# Altium PCB EST_MainV20.PcbDoc (part 4 of 7)
Units mil, origin at the board's own origin, x right, y up, seen from the top; angles counter-clockwise.
Board outline 2745 x 4540 mil, 2 copper layers (Top Layer, Bottom Layer); 326 components, 241 nets, 1052 pads, 399 vias.
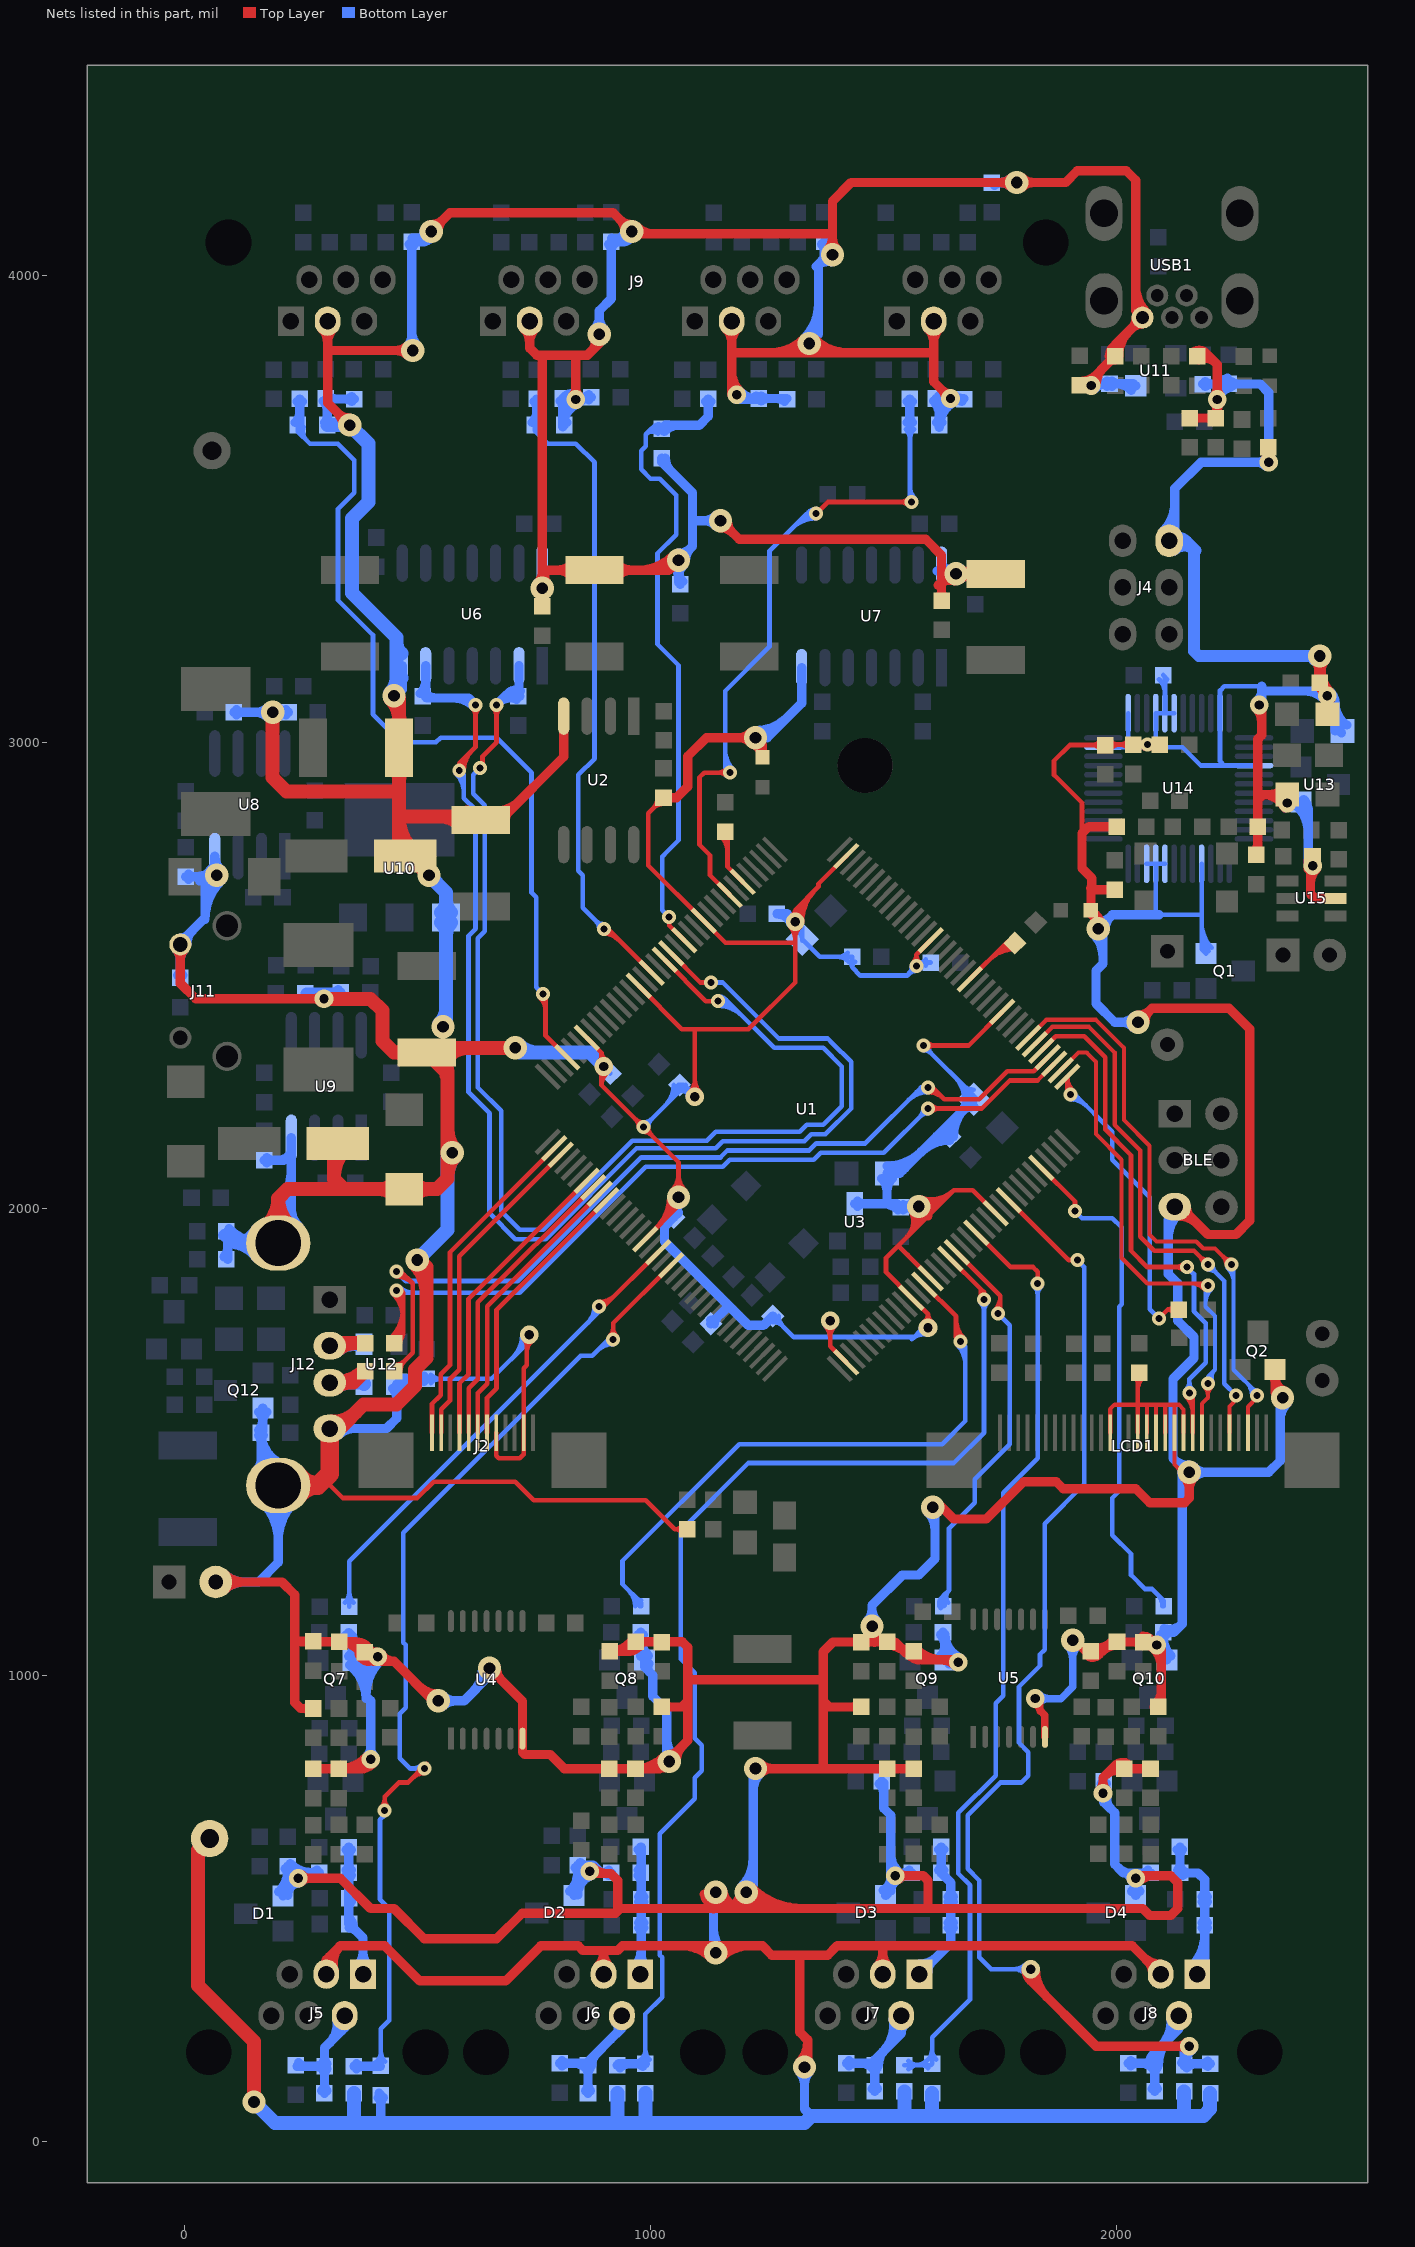
[diagram p4: the nets of this part, all layers, seen from the top]

## Via types
v1: diameter 30, hole 15, Top Layer to Bottom Layer, 237 vias
v2: diameter 50, hole 25, Top Layer to Bottom Layer, 93 vias
v3: diameter 40, hole 20, Top Layer to Bottom Layer, 68 vias
v4: diameter 60, hole 25, Top Layer to Bottom Layer, 1 vias

## Nets (pads, with @x,y where several pads share a name; then routed paths per layer and width w, separated by ;. In a path a pad name is that pad's centre, name@x,y a point inside that pad or via, vN(x,y) a via of type N, cw(c..) or ccw(c..) an arc to the next point about the centre after c; other vN are vias at no path point) (continued)
GND: (continued)
  Bottom Layer w20: J11.2@-17.43,2557.09 cw(c-40.68,2533.83) -7.8,2533.83 cw(c25.09,2533.83) J11.2@1.84,2557.09 ; C69.1@-13.61,2500.57 ccw(c-27.66,2514.62) -7.8,2514.62 ; C69.1@-8.16,2495.12 -7.8,2495.48 J11.2@-7.8,2566.72 ; -7.8,2512.88 ccw(c9.6,2512.88) C69.1@-2.7,2500.57 ; J11.2@-7.8,2580.34 ccw(c-7.8,2602.96) 8.2,2586.97 ; J11.2@4.02,2578.53 J11.2@-7.8,2566.72 ; R141.2@4.02,2712.01 42.01,2712.01 ; J11.2@5.83,2566.72 cw(c48.98,2566.72) 18.46,2597.23 ; R141.2@9.47,2706.55 cw(c22.65,2693.38) 22.65,2712.01 cw(c22.65,2730.64) R141.2@9.47,2717.46 ; 26.56,2712.01 ccw(c26.56,2758.44) 59.39,2725.61 ccw(c43.44,2741.56) U8.4@66,2741.56 ; 33.01,2703.01 cw(c64.44,2671.58) U8.4@65.93,2716 ; 41.01,2712.01 cw(c41.01,2686.01) v2@59.39,2704.39 ; 45,2620.41 cw(c161.84,2620.41) v2@80.45,2704.24 ; 45,2667.71 cw(c115.92,2667.71) U8.4@66.52,2718.59 ; U8.4@65.59,2735.59 cw(c66.56,2734.62) U8.4@66.61,2735.99 ; J10.2@68,1200 160,1200 201.97,1241.97 J12.6@201.97,1406.88 165,1443.85 R160.1@165,1520.02 ; v2@79.7,2726.45 cw(c104.73,2756) U8.4@66,2756 66,2736 42.01,2712.01 ; R159.1@82.31,1943.3 ccw(c126.49,1987.47) 126.49,1925 ; R158.1@85.54,1897.44 ccw(c65.13,1917.86) 94,1917.86 ; J10.2@85.68,1182.32 cw(c128.36,1139.64) 128.36,1200 cw(c128.36,1260.36) J10.2@85.68,1217.68 ; R158.1@94,1891.98 94,1925 ; R159.1@94,1951.98 94,1925 ; R159.1@96.46,1957.44 ccw(c174.77,2035.76) J12.5@174.77,1925 ; R139.1@107,3063.98 107.17,3064.16 v2(190,3064.16) C57.2@224.12,3064.16 ; R139.1@112.46,3058.53 cw(c126.05,3044.94) 126.05,3064.16 ; R139.1@112.46,3069.44 ccw(c125.21,3082.2) 125.21,3064.16 ; 132.77,1925 ccw(c132.77,1968.78) J12.5@168.45,1943.4 ; J12.5@152.15,1955 cw(c94,1996.36) 94,1925 ; J12.5@153.65,1896.13 ccw(c94,1848.95) 94,1925 ; J12.6@157.44,1441.57 ccw(c139.18,1459.82) 165,1459.82 ; R160.1@159.54,1514.56 cw(c146.37,1501.39) 165,1501.39 cw(c183.63,1501.39) R160.1@170.46,1514.56 ; R160.1@159.54,1525.47 ccw(c136.71,1548.3) 169,1548.3 ; Q12.1@160.16,1564.16 cw(c138.82,1542.82) 169,1542.82 cw(c199.18,1542.82) Q12.1@177.84,1564.16 ; 165,1460.61 ccw(c213.93,1460.61) J12.6@195.53,1415.27 ; 165,1490.31 ccw(c225.99,1490.31) J12.6@203.05,1433.8 ; J12.6@167.28,1372.19 cw(c83.54,1288.45) 201.97,1288.45 cw(c320.4,1288.45) J12.6@236.66,1372.19 ; Q12.1@169,1573 169,1524.02 R160.1@165,1520.02 ; R142.2@172.02,2104.01 214.01,2104.01 230,2120 U9.4@230,2152 230,1954.59 J12.5@201.97,1926.56 200.41,1925 94,1925 ; J12.5@177.12,1961.25 ccw(c49.47,2088.9) 230,2088.9 ; R142.2@177.47,2098.55 cw(c190.65,2085.38) 190.65,2104.01 cw(c190.65,2122.64) R142.2@177.47,2109.46 ; v2@179.39,3053.55 ccw(c153.79,3027.94) 153.79,3064.16 ccw(c153.79,3100.37) v2@179.39,3074.76 ; J12.6@181.42,1386.33 cw(c131.82,1336.73) 201.97,1336.73 cw(c272.11,1336.73) J12.6@222.51,1386.33 ; J12.5@191.27,1947.11 ccw(c97.75,2040.62) 230,2040.62 ; 201.05,2104.01 ccw(c201.05,2142.95) U9.4@228.59,2115.41 ; v2@201.05,3054.02 cw(c224.12,3032.84) C57.2@224.12,3064.16 ; v2@201.05,3074.3 ccw(c224.12,3095.47) C57.2@224.12,3064.16 ; D1.1@203.37,535.56 ccw(c157.92,581) R45.1@222.19,581 ; J12.5@205.41,1932.96 ccw(c146.04,1992.34) 230,1992.34 ; J12.6@210.57,1452.33 cw(c238.04,1520.01) R160.1@165,1520.02 ; D1.1@212.2,526.72 222.19,536.7 R45.1@222.19,590.72 ; R45.1@216.73,585.26 cw(c203.56,572.09) 222.19,572.09 cw(c240.82,572.09) R45.1@227.64,585.26 ; C57.2@218.67,3058.7 ccw(c205.5,3045.53) 205.5,3064.16 ccw(c205.5,3082.79) C57.2@218.67,3069.61 ; D1.1@222.19,528.65 cw(c248.72,528.65) v3@246.02,555.05 ; 222.19,550.81 cw(c246.45,550.81) v3@243.98,574.95 ; R45.1@227.64,596.18 ccw(c274.24,642.77) C15.2@274.24,576.88 ; 230,2001.08 ccw(c286.33,2001.08) J12.5@246.5,1961.25 ; R45.1@236.03,576.88 C15.2@290.33,576.88 ccw(c290.33,528.98) v3@252.83,558.78 ; R140.1@260,2461.98 R140.1@262.17,2464.16 ; R140.1@265.46,2456.53 cw(c283.88,2438.11) 283.88,2464.16 ; R140.1@272,2461.98 R140.1@272.17,2462.16 ; C15.2@284.87,571.42 ccw(c271.7,558.25) 271.7,576.88 ccw(c271.7,595.51) C15.2@284.87,582.33 ; v3@290.93,2445.79 ccw(c262.17,2432.46) R140.1@262.17,2464.16 ; R102.1@298.53,3731.54 cw(c277.79,3710.8) 307.12,3710.8 ; v3(300,2450) v3@300,2464.16 ; C41.1@301.66,3685.61 ccw(c288.49,3698.79) 307.12,3698.79 ccw(c325.75,3698.79) C41.1@312.57,3685.61 ; C41.1@307.12,3680.16 307.12,3733.87 305.14,3735.84 C43.1@364.88,3735.84 ; v3@309.24,2446.18 cw(c336.12,2435.07) C58.2@336.12,2464.16 v3@300,2464.16 ; R102.1@309.44,3742.46 ccw(c325.41,3758.42) 325.41,3735.84 ; J12.4@312.2,1528.92 433.92,1528.92 456,1551 U12.1@456,1624 467.39,1635.39 C68.2@519.84,1635.39 ; C58.2@330.67,2458.7 ccw(c317.5,2445.53) 317.5,2464.16 ccw(c317.5,2482.79) C58.2@330.67,2469.61 ; J12.4@331.48,1515.12 cw(c364.82,1481.78) 364.82,1528.92 cw(c364.82,1576.07) J12.4@331.48,1542.73 ; R41.1@347.75,1086.25 cw(c312.85,1051.35) Q7.1@362.2,1051.35 ; R41.1@353.2,1091.7 362.2,1082.7 Q7.1@362.2,1031.72 390,1031.72 ; Q7.1@353.37,1040.56 ccw(c332.03,1061.9) 362.2,1061.9 ccw(c392.38,1061.9) 371.04,1040.56 ccw(c392.38,1061.9) 392.38,1031.72 ccw(c392.38,1001.54) Q7.1@371.04,1022.88 ; Q7.1@354.61,1021.79 cw(c299.74,950.12) 390,950.12 ; C43.1@359.43,3730.39 ccw(c346.25,3717.21) 346.25,3735.84 ccw(c346.25,3754.47) C43.1@359.43,3741.3 ; Q7.1@366.76,1037.68 cw(c330.74,990.62) 390,990.62 ; Q7.1@370.87,1031.72 ccw(c370.87,1084.13) 407.93,1047.07 ccw(c451.21,1003.79) 390,1003.79 ; Q7.1@378.92,1053.56 cw(c361.75,1031.12) 390,1031.12 ; 390,955.5 cw(c499.5,955.5) v3@422.07,1032.93 ; v3@392.93,827.07 ccw(c375.86,844.14) 400,844.14 ccw(c424.14,844.14) v3@407.07,827.07 ; v3(400,820) 400,945 390,955 390,1031.72 ; C19.2@416.59,94.39 cw(c403.42,81.22) 422.05,81.22 cw(c440.68,81.22) C19.2@427.5,94.39 ; C19.2@417.88,104.02 C19.2@422.05,99.85 422.05,70 ; 420,40 422.05,42.05 422.05,70 ; 422.05,57.95 422.05,70 ; v3@423.28,1031.72 390,1031.72 ; v2@441.3,3112.22 ccw(c404.45,3164) U6.7@468,3164 468,3113 v2@455,3100 ; U12.1@446.81,1614.81 cw(c424.62,1592.62) 456,1592.62 cw(c487.38,1592.62) 465.19,1614.81 cw(c514.89,1565.11) C68.2@514.89,1635.39 ; v2@452.9,3095.93 ccw(c432.05,3125.21) U6.7@468,3125.21 ; v2@479.39,3850.61 ccw(c458.24,3871.76) 488.16,3871.76 ; C45.1@482.7,4067.43 cw(c469.53,4054.25) 488.16,4054.25 cw(c506.79,4054.25) C45.1@493.61,4067.43 ; v2@488.16,3841.84 C45.1@488.16,4072.88 ; 488.16,3880.66 ccw(c530.66,3880.66) v2@500.61,3850.61 ; C45.1@488.99,4080.55 ccw(c494.42,4130.58) v2(530,4095) 507.88,4072.88 C45.1@488.16,4072.88 ; 510.7,4072.88 ccw(c510.7,4097.32) v2@534.96,4094.4 ; C68.2@514.39,1629.94 ccw(c501.21,1616.76) 501.21,1635.39 ccw(c501.21,1654.02) C68.2@514.39,1640.85 ; v2@515.11,4096.79 cw(c488.16,4100.02) C45.1@488.16,4072.88 ; v2(545,945) 600,945 655,1000 v2(655,1015) ; v2@555.61,934.39 cw(c581.21,908.79) 581.21,945 cw(c581.21,981.21) v2@555.61,955.61 ; 618.79,963.79 ccw(c567.57,1015) v2@640,1015 ; v2@757.24,3340.61 ccw(c731.25,3366.59) U6.14@768,3366.59 ; v2(767.84,3330) 768,3330.16 U6.14@768,3384 U6.14@768,3413 ; U6.14@768,3365.83 ccw(c803.68,3365.83) v2@778.45,3340.61 ; R104.1@806.53,3731.54 cw(c793.35,3718.37) 811.98,3718.37 cw(c830.61,3718.37) 817.44,3731.54 cw(c837.48,3711.51) v3@837.48,3739.84 ; C42.1@811.98,3676.19 cw(c866.48,3676.19) v3@844.11,3725.88 ; 811.98,3706.35 ccw(c841.31,3706.35) C42.1@820.57,3685.61 ; 811.98,3707.13 cw(c852.55,3707.13) v3@835.89,3744.12 ; R104.1@814.92,3739.94 cw(c832.35,3722.51) v3@845.22,3743.53 ; C42.1@815.12,3680.16 811.98,3683.29 R104.1@811.98,3737 R104.1@814.83,3739.84 ; R104.1@815.94,3740.96 cw(c832.14,3724.76) v3@846.09,3742.93 ; D2.1@827.16,536.84 ccw(c786.55,577.45) R46.1@843.98,577.45 ; v3@831.25,3730.16 ccw(c814.83,3721.08) R104.1@814.83,3739.84 ; D2.1@836,528 843.98,535.98 R46.1@843.98,593 ; R46.1@838.53,587.54 cw(c825.35,574.37) 843.98,574.37 cw(c862.61,574.37) 849.44,587.54 cw(c862.61,574.37) 862.61,593 cw(c862.61,611.63) R46.1@849.44,598.46 ; D2.1@843.98,528.87 cw(c888.28,528.87) v3@873.37,570.58 ; 843.98,557.26 cw(c878.13,557.26) v3@866.63,589.42 ; v3@847.5,3728.39 cw(c872.88,3706) C44.1@872.88,3739.84 R104.1@814.83,3739.84 ; R46.1@860.08,578.77 ccw(c843.98,576.79) R46.1@843.98,593 ; C44.1@867.43,3734.39 ccw(c854.25,3721.21) 854.25,3739.84 ccw(c854.25,3758.47) C44.1@867.43,3745.3 ; v3@877.07,587.07 ccw(c903.42,613.42) C16.2@903.42,576.16 ; v2@879.39,3885.61 ccw(c853.79,3911.21) 890,3911.21 ccw(c926.21,3911.21) v2@900.61,3885.61 ; v3@888.14,581.86 ccw(c899.53,593.25) C16.2@910.75,581.69 ; v2(890,3875) 890,3925 916.16,3951.16 C46.1@916.16,4072.88 ; C16.2@910.67,570.7 ccw(c897.5,557.53) 897.5,576.16 ccw(c897.5,594.79) C16.2@910.67,581.61 ; C46.1@910.7,4067.43 cw(c897.53,4054.25) 916.16,4054.25 cw(c934.79,4054.25) C46.1@921.61,4067.43 ; C16.2@916.12,576.16 893.84,576.16 877,593 R46.1@843.98,593 ; C46.1@917.18,4080.53 ccw(c923.97,4131.03) v2(960,4095) 937.88,4072.88 C46.1@916.16,4072.88 ; 939.78,4072.88 ccw(c939.78,4098.38) v2@964.93,4094.18 ; v2@945.21,4097.47 cw(c916.16,4102.33) C46.1@916.16,4072.88 ; R42.1@973.54,1086.53 cw(c960.37,1073.35) 979,1073.35 cw(c997.63,1073.35) R42.1@984.46,1086.53 ; Q8.1@979,1041 R42.1@979,1091.98 ; R42.1@979,1082.49 ccw(c1036.49,1082.49) Q8.1@995.84,1041.84 ; Q8.1@987,1033 987,1018 1005,1000 1005,955 1035,925 1035,835 v2@1045,825 ; Q8.1@996.65,1025.06 ccw(c1006.74,1016.75) 997.5,1007.5 ; C49.1@1024.16,3608.88 1024.16,3600.84 1090,3535 1090,3475 ; C49.1@1031.87,3608.88 ccw(c1069.91,3608.88) 1043.01,3581.99 ; 1035,863.28 ccw(c1088.28,863.28) v2@1050.61,825.61 ; v2@1049.39,3379.39 cw(c1023.79,3353.79) 1060,3353.79 cw(c1096.21,3353.79) v2@1070.61,3379.39 ; C6.1@1060,1992.01 C6.1@1049.89,1981.89 1030,1962.01 1030,1930 1210,1750 1242.01,1750 C7.1@1262.11,1770.11 ; v2@1060,3367.03 ccw(c1091.75,3367.03) C40.1@1069.3,3344.57 ; v2@1060,3405 ccw(c1060,3441.21) 1085.61,3415.61 ccw(c1111.21,3390) v2@1075,3390 ; C40.1@1063.84,3339.12 1060,3342.96 v2(1060,3390) 1090,3420 1090,3475 ; C8.1@1129.38,1753.43 1167.1,1791.15 ; C8.1@1129.38,1761.15 ccw(c1129.38,1779.78) 1142.55,1766.61 ccw(c1155.72,1753.43) C8.1@1137.09,1753.43 ; v2@1135,405 v2@1135,535 ; 1135,453.28 ccw(c1188.28,453.28) v2@1150.61,415.61 ; 1135,486.72 cw(c1188.28,486.72) v2@1150.61,524.39 ; v2@1139.39,3464.39 ccw(c1113.79,3438.79) 1113.79,3475 ccw(c1113.79,3511.21) v2@1139.39,3485.61 ; v2(1150,3475) 1090,3475 ; v3@1185,3735 1231.98,3735 cw(c1231.98,3790.18) v3@1192.21,3751.93 ; v2@1194.39,545.61 ccw(c1132.57,607.43) 1220,607.43 ; v2(1205,535) 1220,550 v2@1220,785 ; 1208.53,3735 ccw(c1208.53,3760.46) R120.1@1226.53,3742.46 ; v2@1208.54,531.46 ccw(c1180.86,559.14) 1220,559.14 ; 1220,751.72 cw(c1273.28,751.72) v2@1235.61,789.39 ; v2@1225,3005 ccw(c1225,3053.28) 1259.14,3019.14 ; v2(1225,3010) 1250,3010 1324,3084 U7.7@1324,3160 ; v2@1225,3025 ccw(c1225,3121.57) 1293.28,3053.28 ; R120.1@1231.98,3737 C51.1@1291.73,3737 ; R120.1@1237.44,3731.54 cw(c1250.61,3718.37) 1250.61,3737 cw(c1250.61,3755.63) R120.1@1237.44,3742.46 ; 1271.46,3737 cw(c1271.46,3714.42) C51.1@1287.43,3730.39 ; v3@1300.61,2611.56 ccw(c1271.12,2600.75) C61.1@1271.12,2632.16 1292.84,2632.16 v3(1310,2615) ; v2@1319.39,149.39 cw(c1293.79,123.79) 1330,123.79 cw(c1366.21,123.79) v2@1340.61,149.39 ; v2@1329.39,3865.61 ccw(c1255.5,3939.5) 1360,3939.5 ; v2@1330,150 1330,70 1345,55 ; v2(1340,3855) 1360,3875 1360,4025 1372.16,4037.16 C53.1@1372.16,4062.84 ; v2@1343.54,3851.46 ccw(c1303.79,3891.21) 1360,3891.21 ; 1355,4020 cw(c1381.03,3993.97) v2@1387.4,4030.23 ; C53.1@1366.7,4067.43 cw(c1353.53,4054.25) 1372.16,4054.25 cw(c1390.79,4054.25) C53.1@1377.61,4067.43 ; C53.1@1372.16,4072.88 C53.1@1372.16,4062.84 ; C53.1@1379.58,4070.78 ccw(c1399.96,4065) v2@1384.98,4050.02 ; v2(1390,4045) C53.1@1372.16,4062.84 ; U3.2@1438,2011 1510,2011 ; U3.2@1443.66,2005.34 cw(c1457.31,1991.69) 1457.31,2011 cw(c1457.31,2030.31) U3.2@1443.66,2016.66 ; v2@1464.39,1115.61 ccw(c1438.79,1141.21) 1475,1141.21 ccw(c1511.21,1141.21) v2@1485.61,1115.61 ; v2(1475,1105) v2@1475,1115 ; v2@1480,1110 v2@1475,1115 ; R47.1@1490.53,767.54 cw(c1467.66,744.68) 1500,744.68 ; C12.1@1495.92,2064.91 cw(c1469.31,2038.3) 1506.95,2038.3 cw(c1544.58,2038.3) C12.1@1517.97,2064.91 ; R47.1@1495.98,773 1500,768.98 1500,715 1515,700 1515,575 1515,570 v3@1515,565 ; 1498.07,2011 cw(c1498.07,1965.06) R9.1@1530.56,1997.54 ; D3.1@1498.69,539.31 ccw(c1486.62,565) v3@1515,565 ; D3.1@1504,528 1515,539 v3@1515,565 ; C12.1@1506.95,2071.53 ccw(c1506.95,2126.63) 1545.91,2087.67 ; C12.1@1506.95,2091.53 ccw(c1506.95,2194.92) 1580.05,2121.81 ; D3.1@1515,537.43 cw(c1541.52,537.43) v3@1529.52,561.08 ; 1515,618.28 ccw(c1573.28,618.28) v3@1532.07,577.07 ; v3@1525,576.16 C17.2@1560.13,576.16 ; v3@1533.79,565.23 cw(c1552.16,555.26) 1552.16,576.16 C17.2@1560.13,576.16 ; R9.1@1541.47,1997.54 cw(c1554.65,1984.37) 1554.65,2003 cw(c1554.65,2021.63) R9.1@1541.47,2008.46 ; R9.1@1543.62,2003 cw(c1543.62,1973.62) v2@1564.39,1994.39 ; C17.2@1554.67,570.7 ccw(c1541.5,557.53) 1541.5,576.16 ccw(c1541.5,594.79) C17.2@1554.67,581.61 ; v2@1564.01,2015.21 cw(c1536.02,2041.19) R9.1@1536.02,2003 ; v2@1573,2003 R9.1@1536.02,2003 ; 1579.44,2121.2 cw(c1641.57,2059.07) C85.2@1641.57,2146.93 ; v2@1594.39,1349.39 cw(c1556.72,1311.72) 1610,1311.72 ; R122.1@1606.53,3731.54 cw(c1576.13,3701.15) 1619.12,3701.15 ; v2@1610,1370 1610,1250 1575,1215 1540,1215 1475,1150 v2@1475,1115 ; 1613.58,2155.34 cw(c1641.57,2127.35) C85.2@1641.57,2166.93 ; C50.1@1613.66,3685.61 ccw(c1600.49,3698.79) 1619.12,3698.79 ccw(c1637.75,3698.79) C50.1@1624.57,3685.61 ; U7.14@1614.17,3367.08 cw(c1625.24,3350.1) v2@1639.57,3364.43 ; R122.1@1617.44,3731.54 cw(c1630.61,3718.37) 1630.61,3737 cw(c1630.61,3755.63) R122.1@1617.44,3742.46 ; C50.1@1619.12,3675.35 cw(c1682.15,3675.35) v3@1648.36,3728.56 ; C50.1@1619.12,3680.16 1619.12,3729.87 R122.1@1611.98,3737 v3(1643,3737) C52.1@1671.72,3737 ; 1619.12,3711.74 cw(c1659.04,3711.74) v3@1637.64,3745.44 ; R43.1@1621.54,1086.53 cw(c1598.71,1063.7) 1631,1063.7 ; Q9.1@1622.16,1041.84 ccw(c1600.82,1063.18) 1631,1063.18 ccw(c1661.18,1063.18) 1639.84,1041.84 ccw(c1661.18,1063.18) 1661.18,1033 ccw(c1661.18,1002.82) Q9.1@1639.84,1024.16 ; U7.14@1624,3380 v2@1643,3361 ; R43.1@1627,1091.98 R43.1@1631,1087.98 ; C85.2@1629.29,2154.65 cw(c1668.87,2154.65) 1640.88,2182.64 ; U7.14@1630,3374 ccw(c1638.57,3382.56) v2@1645.91,3372.93 ; 1631,1057.22 ccw(c1672.97,1057.22) v3@1655.94,1018.86 ; v3@1635.93,3729.93 ccw(c1618.86,3712.86) 1618.86,3737 ccw(c1618.86,3761.14) v3@1635.93,3744.07 ; C85.2@1649.29,2154.65 cw(c1737.16,2154.65) C9.2@1675.02,2216.78 ; v3@1650.07,3729.93 cw(c1667.14,3712.86) 1667.14,3737 cw(c1667.14,3761.14) v3@1650.07,3744.07 ; v3@1651.46,3737 cw(c1651.46,3714.42) C52.1@1667.43,3730.39 ; Q9.1@1651.84,1022.22 ccw(c1631,1007.47) Q9.1@1631,1033 ; v2(1655,3361) 1693.96,3361 C48.1@1695.84,3359.12 ; v3@1664.06,1037.14 cw(c1686.63,1087.98) R43.1@1631,1087.98 ; v3@1665,1033 Q9.1@1631,1033 ; v2@1665.61,3350.39 cw(c1691.21,3324.79) 1691.21,3361 cw(c1691.21,3397.21) v2@1665.61,3371.61 ; v2@1672.67,3361 cw(c1672.67,3335.95) C48.1@1690.39,3353.66 ; C9.2@1677.49,2234.83 cw(c1639.85,2234.83) 1666.46,2208.22 cw(c1693.08,2181.6) C9.2@1693.08,2219.24 ; C9.2@1693.08,2234.83 1534.18,2075.94 C12.1@1506.95,2075.94 1506.95,2014.06 1510,2011 ; C54.1@1732.72,4200 v2(1785,4200) ; C54.1@1737.3,4193.66 cw(c1752.6,4178.36) 1752.6,4200 ; v2@1774.39,4189.39 ccw(c1748.79,4163.79) 1748.79,4200 ccw(c1748.79,4236.21) v2@1774.39,4210.61 ; v2@1949.39,2589.39 cw(c1899.64,2539.64) 1970,2539.64 ; v3@1952.07,3757.93 cw(c1978.51,3731.49) R149.1@1978.51,3768.88 ; v2@1960,2615 ccw(c1960,2651.21) 1985.61,2625.61 ccw(c2011.21,2600) v2@1975,2600 ; v3@1960,3768.88 2035.12,3768.88 U11.1@2040,3764 ; v3@1963.5,754.58 ccw(c1947.76,773) R48.1@1971.98,773 1971.98,728.02 1995,705 1995,595 2013.84,576.16 ; 1965.07,3768.88 ccw(c1965.07,3787.91) R149.1@1978.53,3774.46 ; 1965.64,3768.88 cw(c1965.64,3750.66) R149.1@1978.53,3763.54 ; R48.1@1966.53,767.54 cw(c1953.35,754.37) 1971.98,754.37 cw(c1990.61,754.37) R48.1@1977.44,767.54 ; v3@1979.47,743.76 ccw(c2007.3,734.28) 1986.51,713.49 ; R149.1@1989.44,3763.54 cw(c2002.33,3750.66) 2002.33,3768.88 ; R149.1@1989.44,3774.46 ccw(c2002.9,3787.91) 2002.9,3768.88 ; R149.1@1996.83,3768.88 cw(c1996.83,3720.83) U11.1@2030.81,3754.81 ; 2002.56,587.44 ccw(c2033.56,618.43) v3@2038.91,574.93 ; v3@2030.36,562.86 ccw(c2013.84,559.26) 2013.84,576.16 ; D4.1@2031.16,536.84 ccw(c2009.52,558.48) v3@2040.13,558.48 ; v3@2033.05,557.93 cw(c2015.98,540.86) 2040.13,540.86 cw(c2064.27,540.86) v3@2047.2,557.93 ; v2@2034.39,2389.39 ccw(c2008.79,2363.79) 2008.79,2400 ccw(c2008.79,2436.21) v2@2034.39,2410.61 ; D4.1@2040,528 2040.13,528.12 v3(2040.13,565) v3@2040.13,576.16 ; v3@2040.13,557.88 ccw(c2069.88,557.88) D4.1@2048.84,536.84 ; v2(2045,2400) 1995,2400 1955,2440 1955,2510 1970,2525 1970,2590 v2(1960,2600) 1990,2630 2090,2630 ; v3@2049.33,561.08 cw(c2072.12,551.38) C18.2@2072.13,576.16 v3@2040.13,576.16 ; C18.2@2066.67,570.7 ccw(c2053.5,557.53) 2053.5,576.16 ccw(c2053.5,594.79) C18.2@2066.67,581.61 ; R44.1@2083.83,1074.93 ccw(c2081.83,1091.98) R44.1@2099,1091.98 ; R44.1@2093.54,1086.53 cw(c2080.37,1073.35) 2099,1073.35 cw(c2117.63,1073.35) 2104.46,1086.53 cw(c2117.63,1073.35) 2117.63,1091.98 cw(c2117.63,1110.61) R44.1@2104.46,1097.44 ; v3@2094.76,1062.83 ccw(c2121.01,1057.01) Q10.1@2102,1038 ; J4.2@2098.19,3451.28 ccw(c2035.89,3513.59) 2124,3513.59 ; R44.1@2099,1082.49 ccw(c2156.49,1082.49) Q10.1@2115.84,1041.84 ; R44.1@2100.96,1099.45 ccw(c2111.3,1138.7) 2140,1110 ; Q10.1@2107,1033 2099,1041 R44.1@2099,1091.98 ; 2110,1936.27 cw(c2186.26,1936.27) BLE.5@2132.34,1990.19 ; J4.2@2112.33,3437.14 ccw(c2084.17,3465.3) 2124,3465.3 ; 2122.5,1462.5 ccw(c2152.78,1492.78) v2@2154.42,1449.99 ; BLE.5@2124,2004 2124,1990 2110,1976 2110,1860 2130,1840 2130,1760 2165,1725 2165,1680 2120,1635 2120,1465 v2@2150,1435 ; J4.2@2124,3432 2124,3544 2180,3600 v3(2325,3600) 2325,3750 2306.88,3768.12 C63.2@2239.84,3768.12 2215,3768.12 ; 2132.93,1452.07 cw(c2115.86,1435) v2@2140,1435 ; 2140,1362.57 cw(c2227.43,1362.57) 2165.61,1424.39 cw(c2191.21,1398.79) 2191.21,1435 cw(c2191.21,1471.21) v2@2165.61,1445.61 ; 2140,1410.86 cw(c2179.14,1410.86) v2@2151.46,1438.54 ; R143.2@2184.02,3768.01 2184.13,3768.12 2215,3768.12 ; R143.2@2189.47,3762.55 cw(c2202.93,3749.1) 2202.93,3768.12 ; R143.2@2189.47,3773.46 ccw(c2202.36,3786.35) 2202.36,3768.12 ; v3@2207.93,3742.07 ccw(c2190.86,3759.14) 2215,3759.14 ccw(c2239.14,3759.14) v3@2222.07,3742.07 ; v3@2215,3726.72 cw(c2249.89,3726.72) C63.2@2241.66,3760.63 ; v3(2215,3735) 2215,3768.12 ; v3@2215,3752.15 cw(c2243.72,3752.15) C63.2@2236.95,3780.06 ; C63.2@2245.3,3762.67 cw(c2258.47,3749.5) 2258.47,3768.12 cw(c2258.47,3786.75) C63.2@2245.3,3773.58 ; v3@2299,3088 ccw(c2282.5,3110) 2310,3110 ; v3(2305,3080) 2310,3085 2310,3110 ; 2310,3120 2310,3110 ; v3@2317.93,3592.93 ccw(c2300.86,3575.86) 2300.86,3600 ccw(c2300.86,3624.14) 2317.93,3607.07 ccw(c2300.86,3624.14) 2325,3624.14 ccw(c2349.14,3624.14) v3@2332.07,3607.07 ; 2350,1546.72 cw(c2403.28,1546.72) v2@2365.61,1584.39 ; v2@2350,1595 2350,1460 2325,1435 v2(2155,1435) v2@2150,1435 ; v3@2360,2860 2372,2872 U13.2@2395,2872 2410,2857 v3@2410,2735 ; v3@2372.07,2862.93 cw(c2393.97,2841.03) U13.2@2393.97,2872 ; U13.2@2386.16,2863.16 cw(c2328.61,2805.61) 2410,2805.61 ; U13.2@2400.3,2877.3 cw(c2376.89,2853.89) U13.2@2410,2853.89 ; 2402.66,3110 cw(c2402.66,3051.72) 2443.87,3092.93 cw(c2386.43,3035.48) C73.2@2467.67,3035.48 ; 2410,2783.28 ccw(c2468.28,2783.28) v3@2427.07,2742.07 ; v3@2458.02,3107.07 cw(c2434.71,3083.77) 2467.67,3083.77 ; C73.2@2467.67,3024.06 2467.67,3083.28 ; C73.2@2467.67,3045.79 ccw(c2498.23,3045.79) C73.2@2481.21,3020.4 ; C73.2@2492.35,3037.01 cw(c2523.36,3083.27) 2467.67,3083.27 ; J11.2@-7.8,2566.72 -7.8,2570.97 45,2623.77 45,2709.02 42.01,2712.01 ; R159.1@85.54,1946.53 cw(c65.13,1926.11) 94,1926.11 ; R159.1@85.54,1946.53 cw(c65.13,1926.11) 94,1926.11 ; R159.1@85.54,1946.53 cw(c65.13,1926.11) 94,1926.11 ; R140.1@262.17,2464.16 v3@300,2464.16 ; 390,1031.72 ccw(c390,1007.07) 371.56,1023.43 cw(c390,1007.07) 390,1031.72 ; 390,1031.72 cw(c390,1056.37) 371.56,1040.01 ccw(c390,1056.37) 390,1031.72 ; 390,1031.72 ccw(c390,1047.95) 405.47,1043.03 cw(c390,1047.95) 390,1031.72 ; 1510,2011 cw(c1510,1989.33) 1529.19,1999.41 ccw(c1510,1989.33) 1510,2011 ; 1510,2011 1528.02,2011 R9.1@1536.02,2003 ; C17.2@1560.13,576.16 ccw(c1560.12,539.9) 1532.59,563.49 cw(c1560.12,539.9) C17.2@1560.13,576.16 ; Q9.1@1631,1033 R43.1@1631,1087.98 ; 2013.84,576.16 v3@2040.13,576.16 ; R44.1@2099,1091.98 2121.98,1091.98 2140,1110 ; 2140,1110 v2@2140,1435 ; v2@2140,1435 v2@2150,1435 ; 2221.21,3768.13 ccw(c2221.21,3786.75) C63.2@2234.39,3773.58 ; 2221.21,3768.12 cw(c2221.21,3749.5) C63.2@2234.39,3762.67 ; 2221.21,3768.13 ccw(c2221.21,3786.75) C63.2@2234.39,3773.58 ; 2221.21,3768.12 cw(c2221.21,3749.5) C63.2@2234.39,3762.67 ; 2221.21,3768.13 ccw(c2221.21,3786.75) C63.2@2234.39,3773.58 ; 2221.21,3768.12 cw(c2221.21,3749.5) C63.2@2234.39,3762.67 ; 2310,3110 2430,3110 2437.03,3102.97 2447.97,3102.97 v3(2450.95,3100) 2467.67,3083.28
  Bottom Layer w25: J4.2@2106.91,3432.67 cw(c2127.03,3408.39) 2149.32,3430.68 ; J4.2@2109.47,3434.09 cw(c2124.23,3389.92) 2157.15,3422.85 ; J4.2@2112,3432 2124,3432 2148,3432 ; J4.2@2122.86,3413.41 cw(c2144.62,3387.15) 2168.74,3411.26 ; J4.2@2125.16,3421.2 cw(c2148,3402.46) 2148,3432 ; J4.2@2125.16,3442.8 ccw(c2148,3461.54) 2148,3432 ; v2(2435,3185) 2425,3175 2415,3185 2175,3185 2165,3195 2165,3415 2148,3432
  Bottom Layer w30: v2@165,70 195,40 420,40 ; C41.1@307.12,3680.16 354.84,3680.16 v2(355,3680) 395,3640 395,3515 360,3480 360,3320 455,3225 v2@455,3100 ; 363.99,41.01 R57.2@363.99,104.02 ; 400,40 420,40 ; v2@442.93,3107.07 ccw(c413.79,3136.21) 455,3136.21 ; v2@455,3111.86 cw(c492.14,3111.86) U6.7@465.88,3138.12 ; 455,3216.14 ccw(c492.14,3216.14) U6.7@465.88,3189.88 ; v2(500,1890) 565,1955 565,2110 v2(575,2120) ; v2(525,2715) 562,2678 U10.1@562,2624 v2@562,2403 ; v2@547.93,2397.07 ccw(c513.96,2431.04) 562,2431.04 ; U10.1@551.39,2613.39 cw(c525.79,2587.79) 562,2587.79 cw(c598.21,2587.79) U10.1@572.61,2613.39 ; U10.1@551.39,2634.61 ccw(c525.79,2660.21) 562,2660.21 ccw(c598.21,2660.21) U10.1@572.61,2634.61 ; 565,2071.72 cw(c623.28,2071.72) v2@582.07,2112.93 ; v2(710,2345) 720,2335 870,2335 v3@895,2310 ; v2@717.07,2352.07 ccw(c758.28,2393.28) 758.28,2335 ; 928.99,58.99 R58.2@928.99,104.02 ; C20.2@988.84,104.12 988.84,41.16 990,40 ; 1543.99,56.01 R59.2@1543.99,108.02 ; 1603.84,56.16 C21.2@1603.84,104.12 ; 2143.99,61.01 R60.2@2143.99,108.02 ; C22.2@2199.84,104.12 2199.84,69.84 2185,55 1345,55 1330,40 990,40 ; 420,40 460,40 990,40
  other v1: 2065,2995
  other v2: 1330,160 1140,405 1140,535 1040,815 2355,1595 555,2390 70,2715 450,3100
  other v3: 870,580 1970,746.98 1825,950 1660,1028 415,1040 2085,1065 1595,1745 2420,2735 2365,2870 1185,3745 1945,3765
HD+: J12.3 R163.2 U12.2 | length 349.3
  Top Layer w30: J12.3@316.87,1632.02 J12.3@312.2,1627.35 363.34,1627.35 R163.2@388.01,1652.02 ; J12.3@321.9,1627.35 ccw(c321.9,1718.12) R163.2@386.09,1653.94 ; J12.3@327.95,1617.08 cw(c352.75,1592.28) 352.75,1627.35 cw(c352.75,1662.42) J12.3@327.95,1637.62
  Bottom Layer w30: J12.3@312.2,1627.35 382.65,1627.35 U12.2@386,1624 ; J12.3@327.95,1617.08 cw(c352.75,1592.28) 352.75,1627.35 cw(c352.75,1662.42) J12.3@327.95,1637.62
HD-: J12.2 R162.2 U12.3 | length 235.2
  Top Layer w30: J12.2@312.2,1706.09 J12.2@318.28,1700.02 ; J12.2@318.28,1712.02 R162.2@388.01,1712.02 ; J12.2@327.95,1695.82 cw(c367.06,1656.71) 367.06,1712.02
  Bottom Layer w30: J12.2@312.2,1706.09 316.11,1710 U12.3@386,1710 ; J12.2@327.95,1695.82 cw(c362.19,1661.58) 362.19,1710
HOSTDM: R162.1 U1.75 | length 2177.8
  Top Layer w10: R162.1@442.01,1721.01 ccw(c374.43,1788.59) 470,1788.59 ; v1@447.93,1817.93 cw(c394.64,1764.64) 470,1764.64 ; R162.1@449.08,1713.94 ccw(c398.57,1764.44) 470,1764.44 ; R162.1@451,1712.02 470,1731.02 ; R162.1@452.25,1724.67 ccw(c454.42,1746.59) 470,1731.01 ; R162.1@456.15,1706.87 ccw(c422.71,1740.3) 470,1740.3 ; v1@462.07,1832.07 cw(c442.93,1812.93) 470,1812.93 ; R162.1@463.65,1713.27 cw(c485.57,1715.44) 470,1731.01 ; 470,1788.79 ccw(c418.79,1788.79) v1(455,1825) 465,1825 470,1820 470,1731.02 ; v1(1595,2215) 1710,2215 1770,2275 1829.65,2275 U1.75@1865.45,2310.8 ; v1@1602.07,2207.93 cw(c1619.14,2190.86) 1619.14,2215 cw(c1619.14,2239.14) v1@1602.07,2222.07
  Bottom Layer w10: v1@460,1820 720,1820 990,2090 1155,2090 1170,2105 1350,2105 1365,2120 1500,2120 v1(1595,2215) ; v1@462.07,1832.07 ccw(c491.21,1861.21) 491.21,1820 ; v1@1585,2215 cw(c1560.86,2215) 1577.93,2197.93 cw(c1595,2180.86) v1@1595,2205
HOSTDP: R163.1 U1.76 | length 2111.6
  Top Layer w10: R163.1@451,1652.02 490,1691.02 490,1840 465,1865 v1(455,1865) cw(c455,1840.86) 472.07,1857.93 ; R163.1@451,1664.73 ccw(c451,1695.43) 472.71,1673.72 ccw(c494.42,1652.02) R163.1@463.72,1652.02 ; v1@455,1855 cw(c455,1806.72) 489.14,1840.86 ; v1@1595,2250 cw(c1595,2201.72) 1629.14,2235.86 ; 1612.07,2252.93 ccw(c1595,2235.86) v1(1595,2260) 1605,2260 1630,2235 1705,2235 1765,2295 1821.81,2295 U1.76@1851.53,2324.72
  Bottom Layer w10: v1(455,1865) 475,1845 715,1845 980,2110 1150,2110 1165,2125 1340,2125 1355,2140 1460,2140 1580,2260 v1(1595,2260) ccw(c1595,2223.79) 1569.39,2249.39 ; 1552.32,2232.32 cw(c1595,2189.64) v1@1595,2250
I_ONA: R21.2 U1.18 | length 1199.1
  Top Layer w10: v1@890,1800 ccw(c890,1846.42) 922.82,1813.59 ; 905.75,1796.52 cw(c890,1812.27) v1(890,1790) 899.23,1790 U1.18@1016.36,1907.14
  Bottom Layer w10: R21.2@345.2,1155.73 ccw(c323.5,1177.44) 354.2,1177.44 ccw(c384.9,1177.44) R21.2@363.19,1155.73 ; R21.2@354.2,1146.74 354.2,1244.2 890,1780 v1(890,1790) cw(c865.86,1790) 882.93,1772.93 ; 865.86,1755.86 ccw(c831.72,1790) v1@880,1790
I_ONB: R22.2 U1.50 | length 1513.6
  Top Layer w10: U1.50@1587.06,1837.54 1655,1769.6 1655,1725 v1(1665,1715) cw(c1689.14,1739.14) 1655,1739.14 ; 1655,1763.28 ccw(c1713.28,1763.28) v1@1672.07,1722.07
  Bottom Layer w10: 953.34,1181.66 cw(c919.7,1148.02) R22.2@967.28,1148.02 ; R22.2@970.22,1164.78 ccw(c979.99,1174.55) R22.2@979.99,1160.73 ; R22.2@970.41,1164.59 cw(c953.84,1148.02) R22.2@977.28,1148.02 ; R22.2@979.99,1148.02 979.99,1155.01 940,1195 940,1245 1190,1495 1625,1495 1675,1545 1675,1705 v1(1665,1715) cw(c1640.86,1690.86) 1675,1690.86 ; v1@1657.93,1707.93 cw(c1616.72,1666.72) 1675,1666.72
I_ONC: R23.2 U1.55 | length 995.3
  Top Layer w10: U1.55@1656.66,1907.14 1750,1813.79 v1@1750,1785 ; v1@1737.93,1782.07 ccw(c1708.79,1811.21) 1750,1811.21
  Bottom Layer w10: R23.2@1621.65,1159.04 ccw(c1615.35,1170) 1627.99,1170 ; R23.2@1622.17,1143.64 cw(c1635.66,1153.79) R23.2@1623.72,1165.73 ; R23.2@1627.99,1148.02 1627.99,1170 ; R23.2@1630.16,1149.65 cw(c1644.95,1160.78) 1631.86,1173.87 ; R23.2@1634.33,1159.04 cw(c1640.63,1170) 1627.99,1170 ; R23.2@1638.15,1155.66 cw(c1654.23,1167.77) 1640,1182.01 ; v1(1745,1775) 1770,1750 1770,1495 1695,1420 1695,1370 1640,1315 1640,1182.01 ; 1627.99,1170 1640,1182.01
I_OND: R24.2 U1.68 | length 1140.1
  Top Layer w10: U1.68@1837.61,2088.09 1910,2015.7 v1(1910,1995)
  Bottom Layer w10: v1(1910,1995) 1925,1980 1990,1980 2010,1960 2010,1795 2005,1790 2005,1395 1990,1380 1990,1300 2030,1260 2030,1215 2060,1185 2075,1185 2099.99,1160.01 R24.2@2099.99,1148.02 ; 2086.88,1173.13 cw(c2061.77,1148.02) R24.2@2097.28,1148.02
INA_AD: C15.1 J5.1 R17.2 R25.2 R26.1 | length 520.6
  Bottom Layer w20: R26.1@347.75,626.25 cw(c334.57,613.07) 353.2,613.07 cw(c371.83,613.07) R26.1@358.66,626.25 ; C15.1@347.87,571.42 cw(c334.98,558.53) 353.2,558.53 ; C15.1@347.87,582.33 ccw(c334.98,595.22) 353.2,595.22 ; 353.2,487.76 ccw(c375.22,487.76) R17.2@359.65,472.19 ; 353.2,500.71 cw(c375.22,500.71) R25.2@359.65,516.28 ; 353.2,542.76 ccw(c375.22,542.76) R25.2@359.65,527.19 ; 353.2,557.96 cw(c372.24,557.96) C15.1@358.78,571.42 ; 353.2,595.79 ccw(c372.24,595.79) C15.1@358.78,582.33 ; R26.1@353.2,631.7 353.2,467.73 R17.2@354.2,466.74 383.7,437.23 J5.1@383.7,359.2 ; R17.2@354.2,459.02 cw(c354.2,440.39) 367.37,453.56 cw(c380.54,466.74) R17.2@361.91,466.74 ; J5.1@371.28,375.55 ccw(c341.31,405.53) 383.7,405.53 ccw(c426.09,405.53) J5.1@396.12,375.55
INA_IO: J5.2 R49.2 R50.1 R57.1 | length 470.2
  Bottom Layer w20: R49.2@242.24,161.74 R50.1@301.2,161.74 ; R49.2@245.44,169.45 ccw(c264.06,188.07) 264.06,161.74 ; R57.1@295.54,109.47 ccw(c281.88,123.14) 301.2,123.14 ; R50.1@298.95,163.99 R50.1@301.2,161.74 ; R57.1@301.2,104.22 R50.1@301.2,161.74 ; 301.2,122.15 ccw(c319.14,122.15) R57.1@306.46,109.47 ; R50.1@306.66,156.28 ccw(c319.83,143.11) 301.2,143.11 ccw(c282.57,143.11) 295.75,156.28 ccw(c282.57,143.11) 282.57,161.74 ccw(c282.57,180.37) 295.75,167.19 ccw(c282.57,180.37) 301.2,180.37 ccw(c319.83,180.37) R50.1@306.66,167.19 ; 312.3,212.3 ccw(c273.42,251.19) J5.2@327.17,262.81 ; 338.24,238.24 ccw(c316.07,260.41) J5.2@346.72,267.04 ; J5.2@344.33,270.46 344.33,244.33 301.2,201.2 R50.1@301.2,161.74
INB_AD: C16.1 J6.1 R18.2 R27.2 R28.1 | length 567.3
  Bottom Layer w20: J6.1@965.77,375.55 ccw(c931.44,409.88) 979.99,409.88 ; R28.1@973.54,626.53 cw(c957.98,610.96) 979.99,610.96 ; C16.1@973.66,570.7 cw(c958.38,555.42) 979.99,555.42 ; C16.1@973.66,581.61 ccw(c958.38,596.9) 979.99,596.9 ; R18.2@974.54,458.56 cw(c961.36,445.39) 979.99,445.39 cw(c998.62,445.39) R18.2@985.45,458.56 ; R18.2@974.54,469.47 ccw(c961.36,482.65) 979.99,482.65 ccw(c998.62,482.65) R18.2@985.45,469.47 ; R27.2@974.54,525.47 ccw(c961.36,538.65) 979.99,538.65 ccw(c998.62,538.65) R27.2@985.45,525.47 ; J6.1@978.19,359.2 979.99,361 R18.2@979.99,464.02 979.99,495 R27.2@979.99,520.02 979.99,630.99 R28.1@979,631.98 ; 979.99,401.17 ccw(c1016.22,401.17) J6.1@990.6,375.55 ; R27.2@974.54,514.56 cw(c961.36,501.39) 979.99,501.39 ; R27.2@974.54,514.56 cw(c961.36,501.39) 979.99,501.39 ; R27.2@974.54,514.56 cw(c961.36,501.39) 979.99,501.39 ; 979.99,501.39 cw(c998.62,501.39) R27.2@985.45,514.56 ; 979.99,501.39 cw(c998.62,501.39) R27.2@985.45,514.56 ; 979.99,501.39 cw(c998.62,501.39) R27.2@985.45,514.56
INB_IO: J6.2 R51.2 R52.1 R58.1 | length 524.6
  Bottom Layer w20: R51.2@804.98,167.99 862.02,167.99 R52.1@866,164.02 ; R51.2@810.44,162.54 cw(c823.61,149.36) 823.61,167.99 cw(c823.61,186.62) R51.2@810.44,173.45 ; 837.77,167.99 cw(c837.77,135.79) 860.54,158.56 cw(c847.37,145.39) 866,145.39 cw(c884.63,145.39) R52.1@871.46,158.56 ; R58.1@860.54,109.47 ccw(c847.37,122.65) 866,122.65 ccw(c884.63,122.65) R58.1@871.46,109.47 ; R58.1@866,104.02 R52.1@866,164.02 ; R52.1@873.66,164.91 cw(c899.12,167.88) 881,186 915,220 ; 926.35,231.35 ccw(c914.95,242.75) J6.2@926.38,254.13 ; J6.2@938.82,270.46 938.82,243.82 915,220 ; R52.1@866,164.02 866,171 915,220 ; R52.1@873.72,164.02 cw(c909.21,164.02) 884.11,189.11 ccw(c909.21,164.02) R52.1@873.72,164.02
INC_AD: C17.1 J7.1 R19.2 R29.2 R30.1 | length 551.6
  Bottom Layer w20: J7.1@1576.61,359.2 1643.99,426.58 R19.2@1643.99,464.02 R29.2@1643.99,520.02 1643.99,555.28 C17.1@1623.12,576.16 1623,576.28 R30.1@1623,631.98 ; J7.1@1576.61,380.7 ccw(c1576.61,432.59) 1613.31,395.9 ; J7.1@1594.17,363.14 cw(c1627.06,363.14) J7.1@1603.81,386.39 ; R30.1@1617.54,626.53 cw(c1604.37,613.35) 1623,613.35 cw(c1641.63,613.35) R30.1@1628.46,626.53 ; C17.1@1617.66,581.61 ccw(c1604.77,594.5) 1623,594.5 ; 1623,595.07 ccw(c1642.03,595.07) C17.1@1628.57,581.61 ; R19.2@1638.54,458.56 cw(c1625.36,445.39) 1643.99,445.39 cw(c1662.62,445.39) R19.2@1649.45,458.56 ; R19.2@1638.54,469.47 ccw(c1625.36,482.65) 1643.99,482.65 ccw(c1662.62,482.65) R19.2@1649.45,469.47 ; R29.2@1638.54,514.56 cw(c1625.36,501.39) 1643.99,501.39 cw(c1662.62,501.39) R29.2@1649.45,514.56 ; R29.2@1638.54,525.47 ccw(c1625.36,538.65) 1643.99,538.65 ccw(c1662.62,538.65) R29.2@1649.45,525.47
INC_IO: J7.2 R53.2 R54.1 R59.1 | length 573.1
  Bottom Layer w20: R53.2@1419.98,167.99 1477.02,167.99 R54.1@1481,164.02 ; R53.2@1425.44,162.54 cw(c1438.61,149.36) 1438.61,167.99 cw(c1438.61,186.62) R53.2@1425.44,173.45 ; 1452.77,167.99 cw(c1452.77,135.79) 1475.54,158.56 cw(c1462.37,145.39) 1481,145.39 cw(c1499.63,145.39) R54.1@1486.46,158.56 ; R59.1@1475.54,113.47 ccw(c1462.37,126.65) 1481,126.65 ccw(c1499.63,126.65) R59.1@1486.46,113.47 ; R59.1@1481,108.02 R54.1@1481,164.02 ; R54.1@1488.72,164.02 cw(c1536.28,164.02) 1502.65,197.65 ; 1498.14,193.14 ccw(c1442.27,249.01) J7.2@1519.98,263.34 ; 1525.05,220.05 ccw(c1487.71,257.39) J7.2@1539.64,266.97 ; J7.2@1526.98,252.27 cw(c1512.57,232.25) 1537.24,232.25 cw(c1561.92,232.25) J7.2@1547.5,252.27 ; J7.2@1537.24,270.46 1537.24,232.24 1481,176 R54.1@1481,164.02
IND_AD: C18.1 J8.1 R20.2 R31.2 R32.1 | length 641.7
  Bottom Layer w20: R32.1@2129.54,626.53 cw(c2116.09,613.07) 2135.12,613.07 ; C18.1@2129.66,581.61 ccw(c2116.49,594.79) 2135.12,594.79 ccw(c2153.75,594.79) 2140.57,581.61 ccw(c2153.75,594.79) 2153.75,576.16 ccw(c2153.75,557.53) C18.1@2140.57,570.7 ; R32.1@2135,631.98 2135.12,631.87 C18.1@2135.12,576.16 2173.84,576.16 2187.99,562.01 R31.2@2187.99,520.02 R20.2@2187.99,464.02 2187.99,374.91 J8.1@2172.28,359.2 ; 2135.12,613.64 cw(c2153.34,613.64) R32.1@2140.46,626.53 ; J8.1@2159.87,375.55 ccw(c2091.96,443.46) 2187.99,443.46 ; J8.1@2174.01,361.41 ccw(c2140.25,395.17) 2187.99,395.17 ; R20.2@2182.54,458.56 cw(c2169.36,445.39) 2187.99,445.39 cw(c2206.62,445.39) R20.2@2193.45,458.56 ; R20.2@2182.54,469.47 ccw(c2169.36,482.65) 2187.99,482.65 ccw(c2206.62,482.65) R20.2@2193.45,469.47 ; R31.2@2182.54,514.56 cw(c2169.36,501.39) 2187.99,501.39 cw(c2206.62,501.39) R31.2@2193.45,514.56 ; R31.2@2182.54,525.47 ccw(c2169.36,538.65) 2187.99,538.65 ccw(c2206.62,538.65) R31.2@2193.45,525.47
IND_IO: J8.2 R55.2 R56.1 R60.1 | length 583.9
  Bottom Layer w20: R55.2@2023.98,167.99 2077.02,167.99 R56.1@2081,164.02 ; R55.2@2029.44,162.54 cw(c2042.61,149.36) 2042.61,167.99 cw(c2042.61,186.62) R55.2@2029.44,173.45 ; 2052.77,167.99 cw(c2052.77,135.79) 2075.54,158.56 cw(c2062.37,145.39) 2081,145.39 cw(c2099.63,145.39) R56.1@2086.46,158.56 ; R56.1@2068.72,164.02 cw(c2104.21,164.02) 2079.11,189.11 ; R60.1@2075.54,113.47 ccw(c2062.37,126.65) 2081,126.65 ccw(c2099.63,126.65) R60.1@2086.46,113.47 ; R56.1@2075.54,169.47 ccw(c2062.37,182.65) 2081,182.65 ccw(c2099.63,182.65) R56.1@2086.46,169.47 ; R60.1@2081,108.02 R56.1@2081,164.02 ; R56.1@2088.72,164.02 cw(c2172.49,164.02) 2113.25,223.25 ; 2092.81,202.81 ccw(c2037.49,258.13) J8.2@2115.42,264.98 ; 2123.12,233.12 ccw(c2093.2,263.03) J8.2@2135.34,266.74 ; J8.2@2132.91,270.46 2132.91,242.91 2081,191 R56.1@2081,164.02
INTA0: C41.2 R99.2 U1.141 | length 1985.4
  Top Layer w10: v1@762.93,2452.93 cw(c733.79,2423.79) 775,2423.79 ; v1(770,2460) 775,2455 775,2371.21 U1.141@821.49,2324.72
  Bottom Layer w10: C41.2@244.12,3680.16 244.12,3665.88 270,3640 330,3640 365,3605 365,3535 330,3500 330,3305 405,3230 405,3060 465,3000 540,3000 550,3010 670,3010 745,2935 745,2677.63 755,2667.63 755,2475 v1(770,2460) ; C41.2@246.7,3679.28 ccw(c265.78,3672.75) 251.52,3658.48 ; C41.2@256.16,3676.04 ccw(c282.68,3666.96) 262.86,3647.14
  Bottom Layer w20: C41.2@238.67,3685.61 ccw(c216.1,3708.18) 248.02,3708.18 ; R99.2@242.56,3730.55 cw(c229.39,3717.38) 248.02,3717.38 cw(c266.65,3717.38) R99.2@253.47,3730.55 ; C41.2@248.02,3684.05 R99.2@248.02,3736.01
INTB0: C42.2 R100.2 U1.128 | length 1616.9
  Top Layer w10: v1@900,2590 cw(c900,2546.27) 930.92,2577.19 ; v1(900,2600) 908.11,2600 U1.128@1002.44,2505.67
  Bottom Layer w10: C42.2@752.12,3680.16 752.12,3667.88 780,3640 840,3640 880,3600 880,3180 ; C42.2@754.78,3679.59 ccw(c776.62,3674.95) 760.83,3659.17 ; C42.2@764.56,3677.51 ccw(c798.1,3670.39) 773.86,3646.14 ; 880,3145 880,3180 ; v1@890,2600 ccw(c865.86,2600) 882.93,2617.07 ccw(c900,2634.14) v1@900,2610 ; v1(900,2600) 855,2645 855,2715 845,2725 845,2930 880,2965 880,3180
  Bottom Layer w20: C42.2@746.67,3685.61 ccw(c724.1,3708.18) 756.02,3708.18 ; R100.2@750.56,3730.55 cw(c737.39,3717.38) 756.02,3717.38 cw(c774.65,3717.38) R100.2@761.47,3730.55 ; C42.2@756.02,3684.05 R100.2@756.02,3736.01
INTC0: C49.2 R117.2 U1.123 | length 1637.4
  Top Layer w10: v1(1040,2625) 1040,2607.31 U1.123@1072.04,2575.27
  Bottom Layer w10: 990.73,3660.73 cw(c1004.14,3647.33) C49.2@1016.12,3662.02 ; 990.86,3660.86 cw(c1014.26,3637.45) C49.2@1023.41,3669.26 ; 998.56,3668.56 cw(c1011.17,3655.95) C49.2@1022.44,3669.77 ; 1002.85,3672.85 cw(c1019.62,3656.09) C49.2@1026.17,3678.88 ; 1006.39,3676.39 cw(c1018.2,3664.57) C49.2@1028.76,3677.52 ; C49.2@1013.21,3665.41 ccw(c1001.88,3658.71) 1001.88,3671.88 ; C49.2@1013.21,3678.34 cw(c1001.88,3685.04) 1001.88,3671.88 ; C49.2@1024.16,3671.88 1001.88,3671.88 ; v1@1030,2635 v1@1035,2630 ; 1030,2760 1037.5,2767.5 ; v1(1040,2625) v1@1035,2630 ; 1001.88,3671.88 990,3660 990,3635 980,3625 980,3585 1000,3565 1020,3565 1055,3530 1055,3445 1015,3405 1015,3210 1060,3165 1060,2790 1037.5,2767.5 ; v1@1035,2630 1025,2640 1025,2755 1037.5,2767.5
  Bottom Layer w20: C49.2@1024.16,3671.88 1032.12,3679.84 1104.84,3679.84 1124.02,3699.02 R117.2@1124.02,3736.01 ; C49.2@1029.61,3666.42 cw(c1062.02,3634.01) 1062.02,3679.84 ; R117.2@1118.56,3730.55 cw(c1105.39,3717.38) 1124.02,3717.38 cw(c1142.65,3717.38) R117.2@1129.47,3730.55
INTD0: C50.2 R118.2 U1.116 | length 1845.4
  Top Layer w10: v1@1162.93,2927.93 ccw(c1145.86,2910.86) 1145.86,2935 ccw(c1145.86,2959.14) v1@1162.93,2942.07 ; U1.116@1169.48,2672.7 1127.5,2714.68 1127.5,2757.5 1105,2780 1105,2925 1115,2935 v1(1170,2935) ; v1(1355,3490) 1380,3515 v1(1560,3515) ; v1@1552.93,3507.93 ccw(c1535.86,3490.86) 1535.86,3515 ccw(c1535.86,3539.14) v1@1552.93,3522.07
  Bottom Layer w10: v1@1160,2930 1160,3110 1255,3205 1255,3410 1335,3490 v1(1355,3490) ccw(c1355,3441.72) 1320.86,3475.86 ; 1160,2959.14 ccw(c1194.14,2959.14) v1(1170,2935) ; 1160,2983.28 ccw(c1218.28,2983.28) v1@1177.07,2942.07 ; 1303.79,3458.79 cw(c1355,3407.57) v1@1355,3480 ; 1337.93,3492.93 cw(c1355,3475.86) v1@1355,3500 ; C50.2@1547.13,3671.17 cw(c1525.42,3649.46) 1556.13,3649.46 cw(c1586.83,3649.46) C50.2@1565.12,3671.17 ; v1@1552.93,3522.07 ccw(c1545.21,3529.79) 1556.12,3529.79 ; 1556.13,3548.5 ccw(c1593.5,3548.5) v1@1567.07,3522.07 ; C50.2@1556.13,3680.16 1556.13,3518.88 v1(1560,3515)
  Bottom Layer w20: R118.2@1550.56,3730.55 cw(c1537.39,3717.38) 1556.02,3717.38 cw(c1574.65,3717.38) R118.2@1561.47,3730.55 ; C50.2@1550.67,3685.61 ccw(c1537.76,3698.52) 1556.02,3698.52 ; C50.2@1556.02,3680.27 R118.2@1556.02,3736.01 ; 1556.02,3699.05 ccw(c1575.02,3699.05) C50.2@1561.58,3685.61
KEY0: J2.12 U1.2 | length 718.4
  Top Layer w10: J2.12@531.46,1520 531.46,1581.46 550,1600 550,1645 570,1665 570,1906.19 U1.2@793.65,2129.85
KEY1: J2.11 U1.3 | length 702.1
  Top Layer w10: J2.11@551.15,1520 551.15,1570 570,1588.85 570,1635 590,1655 590,1898.36 U1.3@807.57,2115.93
KEY2: J2.9 U1.7 | length 653.2
  Top Layer w10: J2.9@590.52,1520 590.52,1625.52 610,1645 610,1807 U1.7@863.25,2060.25
KEY3: J2.8 U1.8 | length 636.9
  Top Layer w10: J2.8@610.2,1520 610.2,1615.2 630,1635 630,1799.16 U1.8@877.17,2046.33
KEY4: J2.7 U1.9 | length 620.6
  Top Layer w10: J2.7@629.89,1520 629.89,1604.89 650,1625 650,1791.32 U1.9@891.09,2032.41
KEY5: J2.6 U1.10 | length 604.3
  Top Layer w10: J2.6@649.57,1520 649.57,1594.57 670,1615 670,1783.48 U1.10@905.01,2018.49
LCD_LED: R3.2 U1.73 | length 792.8
  Top Layer w10: 1893.28,2260.25 ccw(c1913.96,2260.25) v1(1900,2245) 1893.28,2251.72 U1.73@1893.28,2282.96 ccw(c1934.74,2282.96) v1@1906.75,2252.38 ; v1(2090,1765) 2109.02,1784.02 ; R3.2@2121.24,1777.26 ccw(c2109.02,1769.59) 2109.02,1784.02 ; R3.2@2121.24,1790.77 cw(c2109.02,1798.44) 2109.02,1784.02 ; R3.2@2132.01,1784.02 2109.02,1784.02
  Bottom Layer w10: v1@1900,2235 cw(c1900,2186.72) 1934.14,2220.86 ; 1917.07,2237.93 ccw(c1900,2220.86) v1(1900,2245) 1910,2245 1990,2165 1990,2105 2070,2025 2070,1785 v1(2090,1765)
LCD_RST: LCD1.9 U1.77 | length 1265.6
  Top Layer w10: U1.77@1837.61,2338.64 1868.97,2370 1930,2370 1975,2325 1975,2170 2030,2115 2030,1910 2065,1875 v1(2150,1875) ; v1@2142.93,1867.93 ccw(c2125.86,1850.86) 2125.86,1875 ccw(c2125.86,1899.14) v1@2142.93,1882.07 ; v1@2147.93,1597.93 cw(c2112.7,1562.7) 2162.52,1562.7 ; LCD1.9@2162.52,1520 2162.52,1597.48 v1(2155,1605) cw(c2136.85,1586.85) 2162.52,1586.85
  Bottom Layer w10: v1@2147.93,1612.07 ccw(c2130.86,1629.14) 2155,1629.14 ccw(c2179.14,1629.14) v1@2162.07,1612.07 ; v1(2150,1875) 2165,1860 2165,1780 2190,1755 2190,1670 2155,1635 v1(2155,1605)
LCD_SCK: LCD1.8 U1.74 | length 1275.7
  Top Layer w9: U1.74@1879.37,2296.88 1917.49,2335 1935,2335 1955,2315 1955,2160 2010,2105 2010,1895 2065,1840 2190,1840 v1(2195,1835) ; 2157.58,1840 cw(c2157.58,1797.58) v1@2187.58,1827.58 ; 2179.31,1840 cw(c2179.31,1819.31) v1@2193.94,1833.94 ; LCD1.8@2182.2,1520 2182.2,1582.2 2195,1595 v1(2195,1625) ; v1@2187.58,1617.58 cw(c2169.65,1599.65) 2195,1599.65 cw(c2220.35,1599.65) v1@2202.42,1617.58
  Bottom Layer w9: 2190,1797.58 cw(c2232.42,1797.58) v1@2202.42,1827.58 ; 2190,1819.31 cw(c2210.69,1819.31) v1@2196.06,1833.94 ; v1@2190,1835 2190,1790 2210,1770 2210,1655 ; v1(2195,1625) 2195,1640 2210,1655 ; v1@2196.39,1625.56 cw(c2213.35,1632.46) 2200.41,1645.41 ; v1@2204.73,1628.95 cw(c2227,1638) 2210,1655
LCD_SDAI: LCD1.5 U1.78 | length 1295.3
  Top Layer w9: U1.78@1823.69,2352.56 1861.13,2390 1940,2390 1995,2335 1995,2180 2050,2125 2050,2060 ; 2050,2075 2050,2060 ; v1@2184.5,1880 ccw(c2159.15,1880) 2177.08,1897.92 ccw(c2195,1915.85) v1@2195,1890.5 ; v1(2195,1880) 2165,1910 2080,1910 2050,1940 2050,2060 ; LCD1.5@2241.26,1520 2241.26,1576.26 2250,1585 2250,1600 v1(2255,1600)
  Bottom Layer w9: v1@2195,1869.5 cw(c2195,1844.15) 2212.92,1862.08 cw(c2230.85,1880) v1@2205.5,1880 ; v1(2195,1880) 2230,1845 2230,1805 ; 2230,1815 2230,1805 ; v1(2255,1600) 2230,1625 2230,1805
LCD_SDAO: LCD1.3 U1.79 | length 1392.8
  Top Layer w9: U1.79@1809.77,2366.48 1848.29,2405 1955,2405 2015,2345 2015,2190 2070,2135 2070,1945 2085,1930 2170,1930 2185,1915 2210,1915 v1(2245,1880) ; v1@2234.5,1880 ccw(c2209.15,1880) 2227.08,1897.92 ccw(c2245,1915.85) v1@2245,1890.5 ; LCD1.3@2280.63,1520 2280.63,1575.63 v1@2300,1595
  Bottom Layer w9: v1@2237.58,1872.58 cw(c2207.58,1842.58) 2250,1842.58 ; v1@2243.94,1878.94 cw(c2229.31,1864.31) 2250,1864.31 ; v1(2245,1880) 2250,1875 2250,1655 2300,1605 v1(2300,1600) v1@2295,1605 ; 2278.54,1626.46 cw(c2252.08,1600) v1@2289.5,1600 ; 2290.61,1614.39 ccw(c2300,1623.78) v1@2300,1610.5
LED1: R169.2 U1.88 | length 253.9
  Top Layer w10: U1.88@1684.49,2491.75 1762.13,2569.39 R169.2@1781.37,2569.39 ; 1726.82,2534.08 cw(c1781.37,2479.54) R169.2@1781.37,2556.67 ; 1743.89,2551.15 cw(c1781.37,2513.68) R169.2@1781.37,2566.67 ; R169.2@1760.96,2568.22 cw(c1781.37,2547.82) R169.2@1781.37,2576.67
LED2: R170.2 U1.114 | length 189.8
  Top Layer w10: R170.2@1150.99,2799.02 cw(c1117.17,2765.2) 1165,2765.2 ; R170.2@1158.06,2806.09 cw(c1141.32,2789.34) 1165,2789.34 ; R170.2@1159.98,2808.01 1165,2802.99 1165,2732.86 U1.114@1197.31,2700.54 ; 1165,2789.42 cw(c1178.57,2789.42) R170.2@1168.98,2799.02
LEGDETA: C19.1 R50.2 U1.20 | length 2460.6
  Top Layer w10: v1@422.93,717.07 ccw(c405.86,734.14) 430,734.14 ccw(c454.14,734.14) v1@437.07,717.07 ; v1(430,710) 430,740 460,770 480,770 v1@520,810 ; 489.39,779.39 cw(c515,753.79) v1@515,790 ; 501.46,791.46 ccw(c492.93,800) v1@505,800 ; v1@912.93,1727.07 ccw(c895.86,1744.14) 920,1744.14 ccw(c944.14,1744.14) v1@927.07,1727.07 ; v1(920,1720) 920,1755.1 U1.20@1044.2,1879.3
  Bottom Layer w10: C19.1@413.06,171.83 ccw(c391.35,193.54) 422.05,193.54 ccw(c452.75,193.54) C19.1@431.04,171.83 ; C19.1@422.05,162.84 422.05,242.05 440,260 440,500 420,520 420,690 430,700 v1(430,710) ; v1@507.93,792.93 ccw(c490.86,775.86) 490.86,800 ccw(c490.86,824.14) v1@507.93,807.07 ; v1(515,800) 485,800 462.5,822.5 462.5,917.5 475,930 475,1065 470,1070 470,1305 850,1685 875,1685 910,1720 v1(920,1720) ccw(c920,1695.86) 902.93,1712.93 ; 885.86,1695.86 cw(c920,1661.72) v1@920,1710
  Bottom Layer w20: R50.2@364.2,161.74 C19.1@420.95,161.74 ; R50.2@369.65,156.28 cw(c382.83,143.11) 382.83,161.74 cw(c382.83,180.37) R50.2@369.65,167.19 ; 400.76,161.74 ccw(c400.76,184.13) C19.1@416.59,168.29
LEGDETB: C20.1 R52.2 U1.54 | length 2571.4
  Top Layer w10: U1.54@1642.74,1893.22 1707.98,1827.98 ; v1(1715,1805) 1707.98,1812.02 1707.98,1827.98 ; 1715,1820 1715,1820.95 1707.98,1827.98
  Bottom Layer w10: C20.1@979.85,176.11 ccw(c958.14,197.82) 988.84,197.82 ccw(c1019.54,197.82) C20.1@997.83,176.11 ; C20.1@988.84,167.12 988.84,273.84 1025,310 1025,395 1020,400 1020,660 1095,735 1095,780 1110,795 1110,850 1095,865 1095,1005 1065,1035 1065,1310 1210,1455 1650,1455 1715,1520 v1(1715,1805) v1@1715,1810 ; v1@1707.93,1797.93 cw(c1690.86,1780.86) 1715,1780.86 cw(c1739.14,1780.86) v1@1722.07,1797.93
  Bottom Layer w20: R52.2@928.99,164.02 932.09,167.12 C20.1@988.84,167.12 ; R52.2@934.45,158.56 cw(c955.11,137.9) 955.11,167.12 ; C20.1@983.39,161.66 ccw(c970.21,148.49) 970.21,167.12 ccw(c970.21,185.75) C20.1@983.39,172.57
LEGDETC: C21.1 R54.2 U1.58 | length 2226.5
  Top Layer w10: U1.58@1698.41,1948.89 1772.31,1875 1820,1875 1830,1865 v1(1830,1840)
  Bottom Layer w10: R54.2@1543.99,164.02 1600.74,164.02 C21.1@1603.84,167.12 1603.84,223.84 1685,305 1685,550 1660,575 1660,705 1740,785 1740,940 1756,956 1756,1391 1830,1465 1830,1830 v1@1820,1840 ; R54.2@1552.98,155.02 cw(c1574.69,133.32) 1574.69,164.02 cw(c1574.69,194.72) R54.2@1552.98,173.01 ; 1565.65,164.02 ccw(c1565.65,205.31) 1594.85,176.11 ccw(c1573.14,197.82) 1603.84,197.82 ccw(c1634.54,197.82) C21.1@1612.83,176.11 ; 1580.63,164.02 cw(c1580.63,143.91) C21.1@1594.85,158.13 ; v1@1822.93,1832.93 cw(c1805.86,1815.86) 1830,1815.86 cw(c1854.14,1815.86) v1@1837.07,1832.93
LEGDETD: C22.1 R56.2 U1.63 | length 2855.2
  Top Layer w10: U1.63@1768.01,2018.49 1896.5,1890 v1(1915,1890)
  Top Layer w20: v3@1805,370 ccw(c1841.21,370) 1815.61,344.39 ; v3(1815,370) 1815,345 1955,205 v3(2155,205) ; v3@1825,370 ccw(c1909.5,370) 1849.75,310.25 ; v3@2147.93,197.93 ccw(c2130.86,180.86) 2130.86,205 ccw(c2130.86,229.14) v3@2147.93,212.07
  Bottom Layer w10: v3@1804.39,359.39 ccw(c1778.79,333.79) 1778.79,370 ccw(c1778.79,406.21) v3@1804.39,380.61 ; v3(1815,370) 1730,370 1705,395 1705,560 1680,585 1680,700 1750,770 1795,770 1810,785 1810,835 1790,855 1790,975 1835,1020 1835,1045 1845,1055 1845,1290 ; 1845,1320 1845,1290 ; v1(1915,1890) 1930,1875 1930,1855 ; 1930,1865 1930,1855 ; 1845,1290 1845,1325 1930,1410 1930,1855
  Bottom Layer w20: R56.2@2138.54,169.47 ccw(c2125.36,182.65) 2143.99,182.65 ccw(c2162.62,182.65) R56.2@2149.45,169.47 ; R56.2@2143.99,162.57 cw(c2187.35,162.57) v3@2161.06,197.05 ; R56.2@2149.45,158.56 cw(c2170.11,137.9) 2170.11,167.12 ; v3(2155,205) 2143.99,193.99 R56.2@2143.99,164.02 2147.09,167.12 C22.1@2199.84,167.12 ; C22.1@2194.39,161.66 ccw(c2181.21,148.49) 2181.21,167.12 ccw(c2181.21,185.75) C22.1@2194.39,172.57
MAIN0: R106.1 U1.125 U6.6 | length 3119.2
  Top Layer w10: v1@600,2940 cw(c660.36,2940) 617.68,2982.68 ; 600.61,2965.61 ccw(c626.21,2940) v1(590,2940) 590,2955 625,2990 v1(625,3080) ; v1@617.93,3072.93 cw(c600.86,3055.86) 625,3055.86 cw(c649.14,3055.86) v1@632.07,3072.93 ; U1.125@1044.2,2547.43 1106.63,2485 v1(1130,2485)
  Bottom Layer w10: v1@582.93,2932.93 cw(c541.72,2891.72) 600,2891.72 ; v1@590,2945 v1(590,2940) ; 600,2915.86 ccw(c565.86,2915.86) v1(590,2940) ; v1(1130,2485) 1155,2485 1275,2365 1380,2365 1390,2355 1430,2315 1430,2215 1375,2160 1345,2160 1330,2145 1155,2145 1140,2130 970,2130 775,1935 710,1935 655,1990 655,2205 610,2250 610,2585 625,2600 625,2855 600,2880 600,2930 v1(590,2940)
  Bottom Layer w20: R106.1@506.56,3104.46 ccw(c478.94,3132.08) U6.6@518,3132.08 ; R106.1@517.47,3104.46 ccw(c540.3,3127.29) 540.3,3095 ; U6.6@518,3164 518,3097.02 520.02,3095 610,3095 v1(625,3080) v1@624,3079 ; 576.72,3095 cw(c576.72,3031.72) v1@621.46,3076.46
MAIN1: R105.1 U1.126 U6.2 | length 3059.2
  Top Layer w10: v1@640,2945 640,2970 670,3000 v1(670,3080) ; v1@662.93,3072.93 cw(c645.86,3055.86) 670,3055.86 cw(c694.14,3055.86) v1@677.07,3072.93 ; U1.126@1030.28,2533.51 1118.79,2445 v1(1145,2445)
  Bottom Layer w10: v1(635,2945) 620,2930 620,2890 645,2865 645,2595 630,2580 630,2260 680,2210 680,2095 ; 680,2020 680,2095 ; 800,1985 795,1980 ; v1@1145,2435 cw(c1145,2362.57) 1196.21,2413.79 ; v1@1145,2455 cw(c1145,2430.86) 1162.07,2447.93 ; 1179.14,2430.86 ccw(c1145,2396.72) v1(1145,2445) 1165,2445 1265,2345 1370,2345 1410,2305 1410,2220 1370,2180 1335,2180 1320,2165 1140,2165 1121,2146 961,2146 795,1980 ; 680,2095 680,1995 720,1955 770,1955 795,1980
  Bottom Layer w20: v1(670,3080) 689,3099 R105.1@716.02,3099 720.02,3099 718,3101.02 U6.2@718,3164 ; v1@675.49,3085.49 cw(c698.76,3062.23) R105.1@712.74,3092.01 ; 690.87,3100.87 cw(c716.02,3075.72) R105.1@716.02,3111.28 ; 695.64,3105.64 cw(c711.63,3089.65) R105.1@721.23,3110.12 ; R105.1@710.56,3093.54 ccw(c697.39,3080.37) 697.39,3099 ccw(c697.39,3117.63) 710.56,3104.46 ccw(c692.6,3122.42) 718,3122.42